# Altium PCB Tassel43_Without_RGB_Right.pcbdoc
Units mil, origin at the board's own origin, x right, y up, seen from the top; angles counter-clockwise.
Board outline 4200 x 3700 mil, 2 copper layers (Top Layer, Bottom Layer); 34 components, 30 nets, 83 pads, 20 vias.
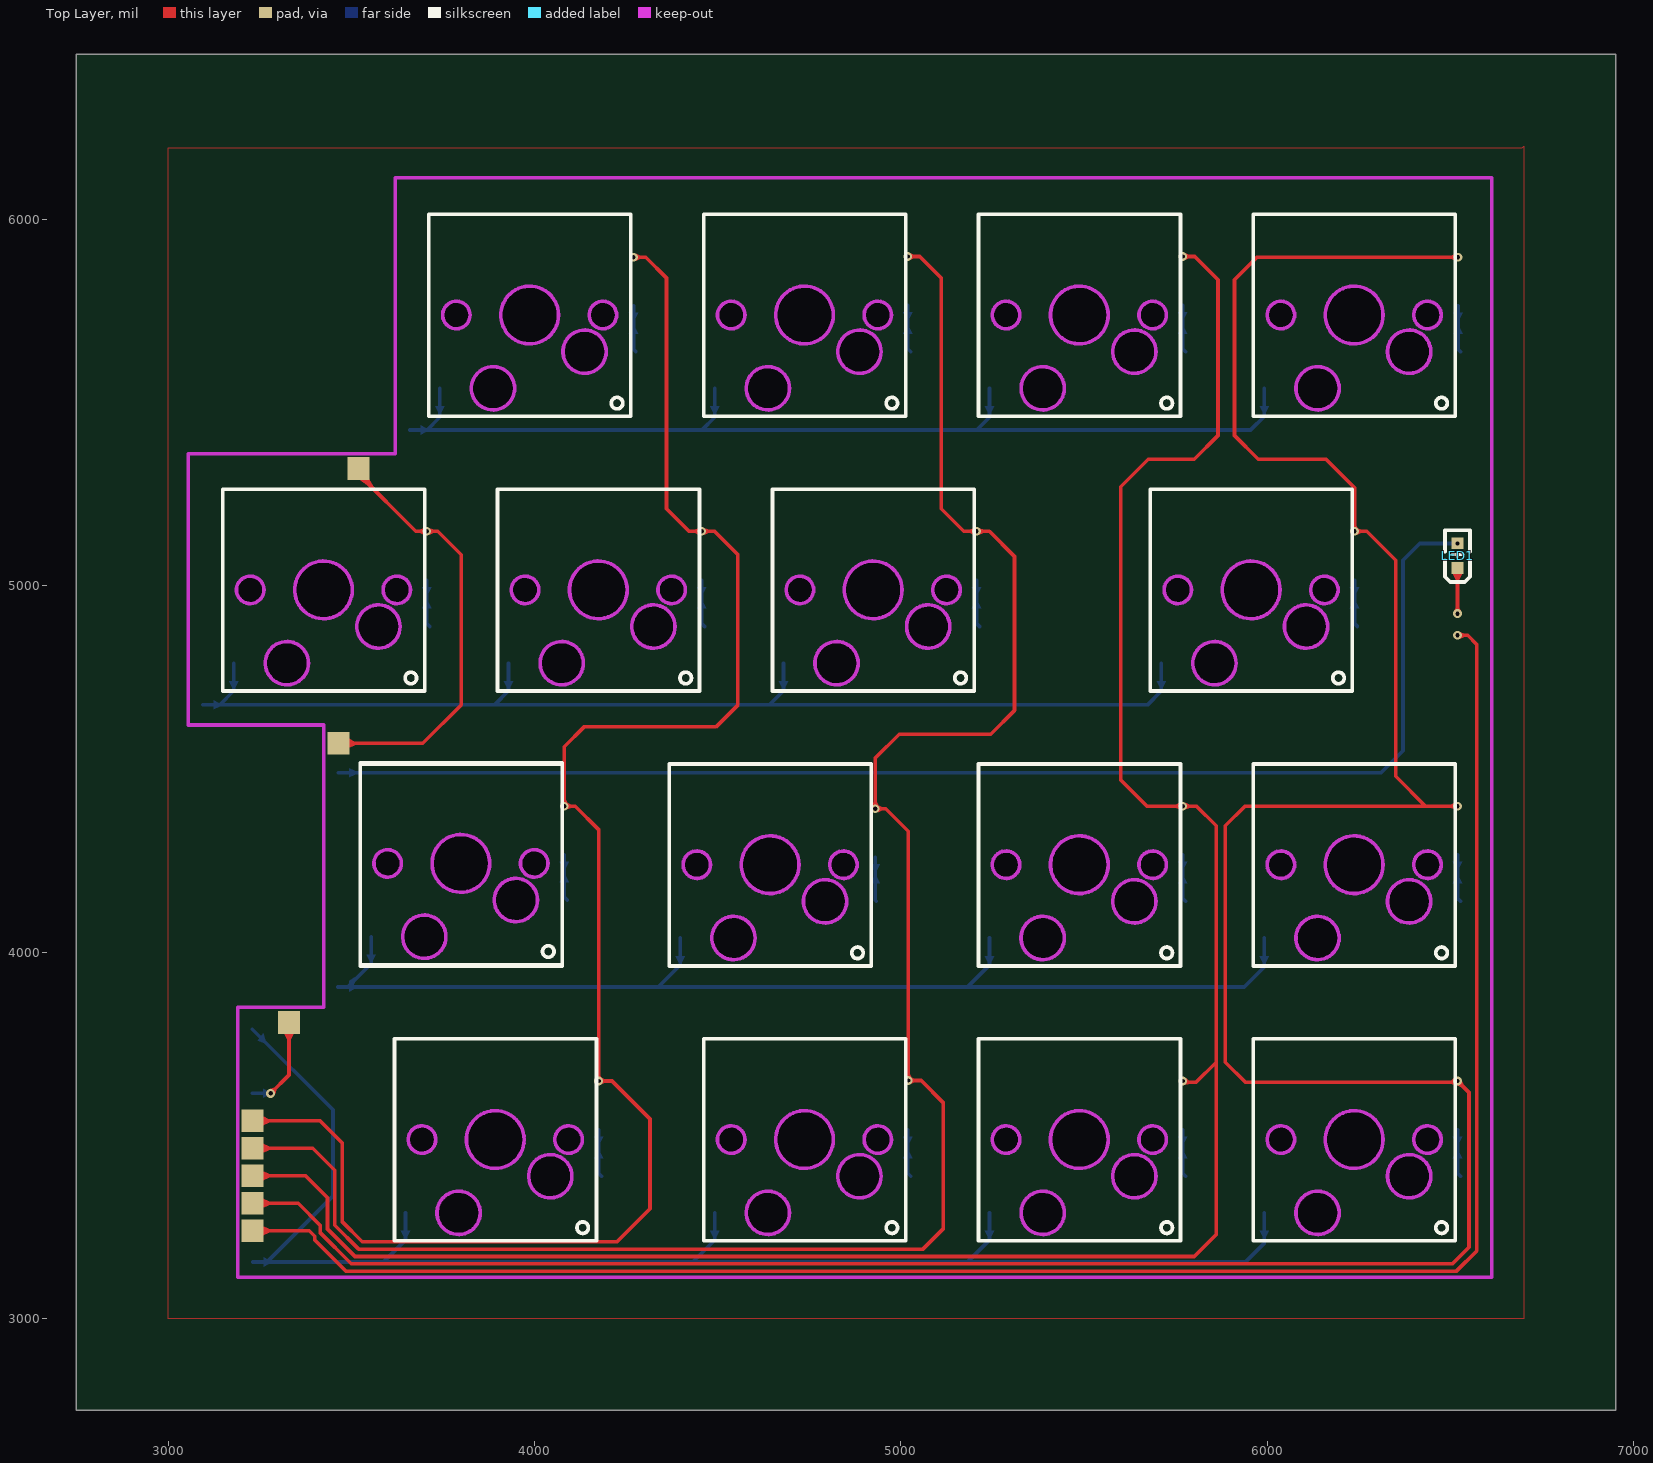
[diagram p0: Top Layer view]
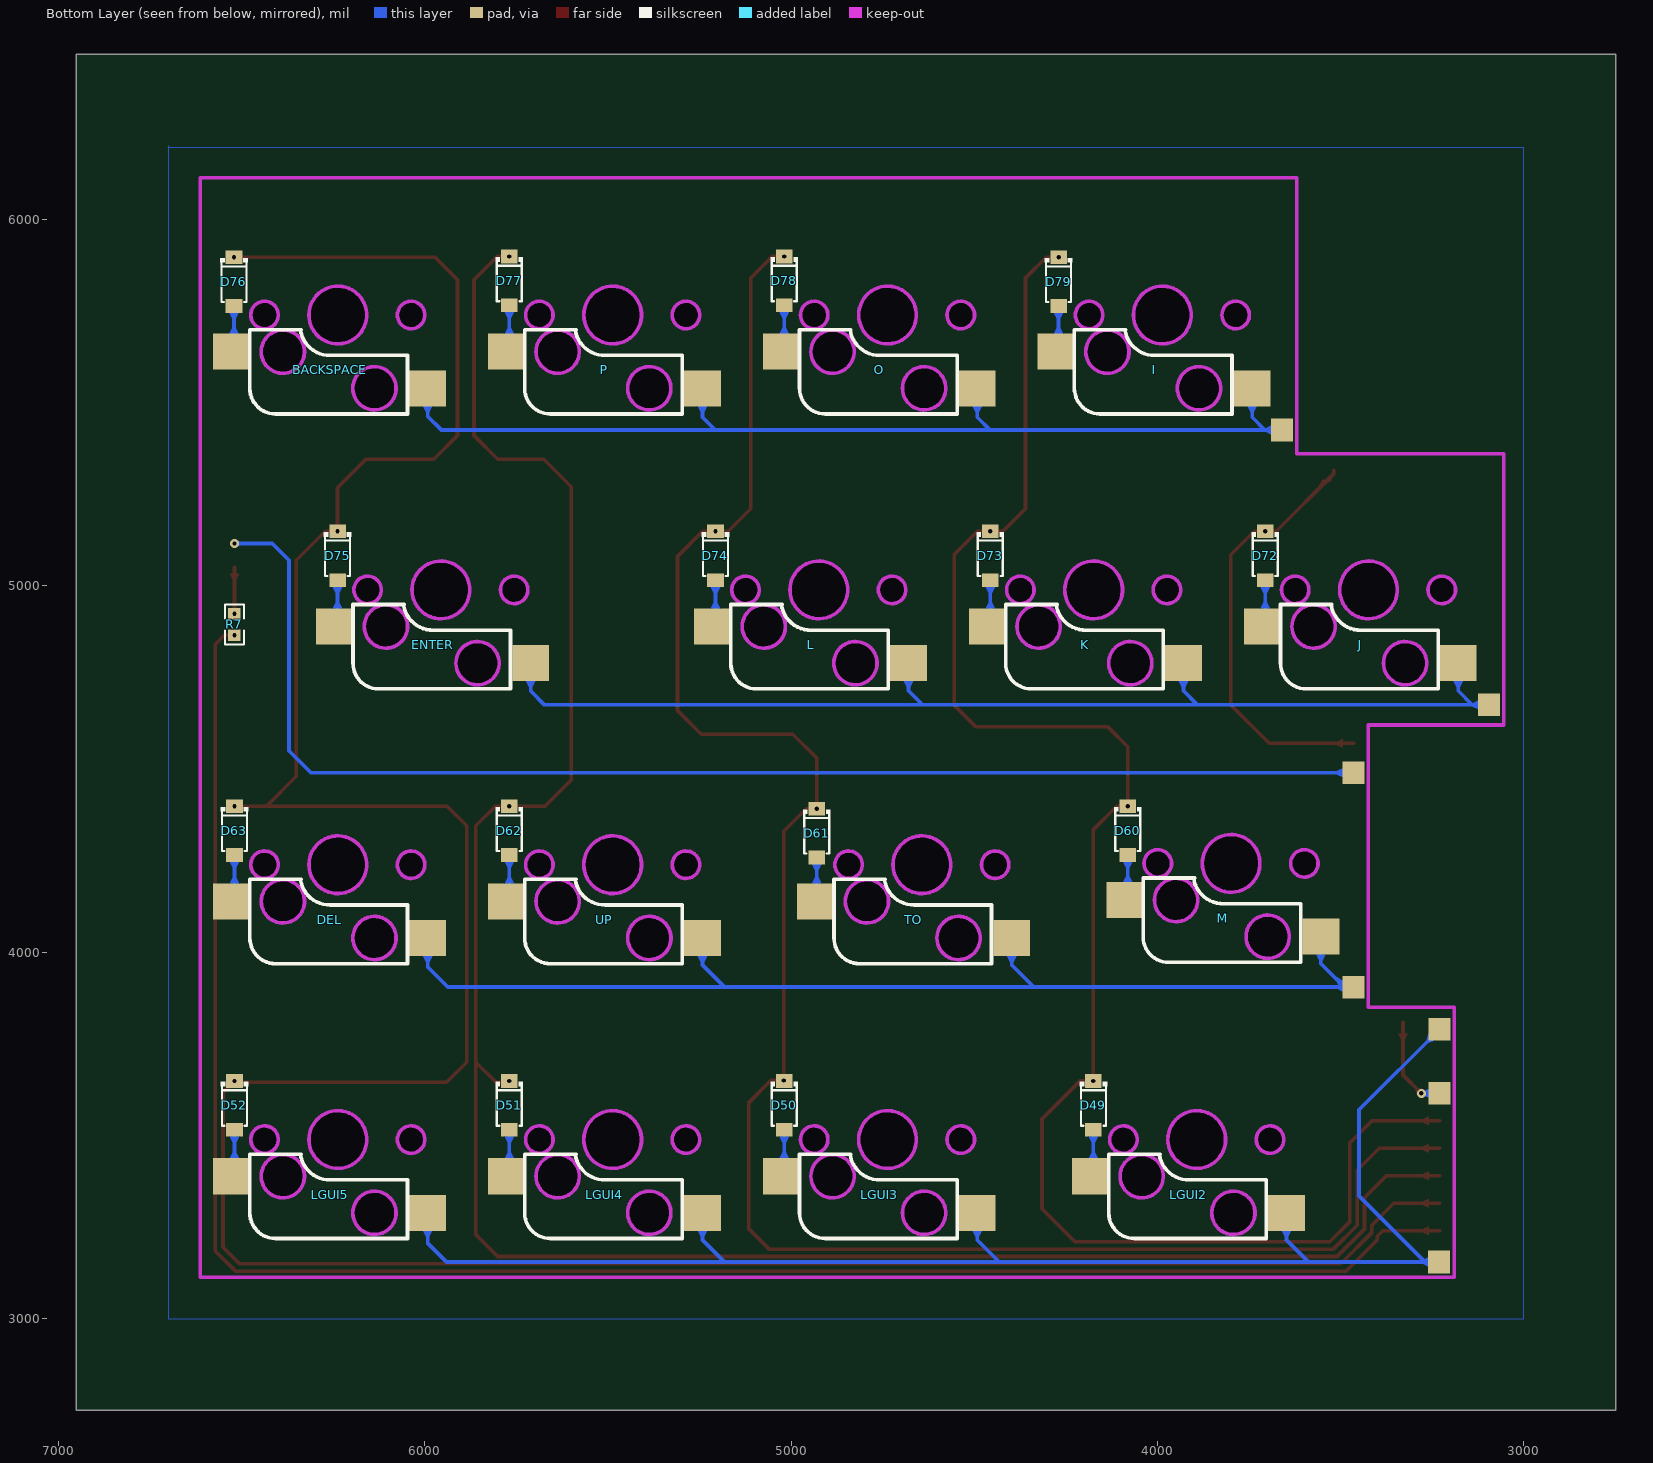
[diagram p1: Bottom Layer view, seen from below]

## Layer stack, top to bottom
Top Layer: signal copper (thickness not stored)
Dielectric: dielectric 12.6, FR-4, Dk 4.8
Bottom Layer: signal copper (thickness not stored)

## Board outline
6950,2750 2750,2750 2750,6450 6950,6450

## Components (designator, comment, footprint, x,y, rotation, side; value= is the part's Value field where it differs from the comment)
BACKSPACE "凯华热插拨" 凯华热插拨 6236.74,5738.89 r0 top
D49 "1N4148W" SOD-123_L2.8-W1.8-LS3.7-RD 4174.88,3582 r270 bottom
D50 "1N4148W" SOD-123_L2.8-W1.8-LS3.7-RD 5018.65,3582 r270 bottom
D51 "1N4148W" SOD-123_L2.8-W1.8-LS3.7-RD 5768.66,3582 r270 bottom
D52 "1N4148W" SOD-123_L2.8-W1.8-LS3.7-RD 6518.68,3582 r270 bottom
D60 "1N4148W" SOD-123_L2.8-W1.8-LS3.7-RD 4081.13,4332.01 r270 bottom
D61 "1N4148W" SOD-123_L2.8-W1.8-LS3.7-RD 4930,4325 r270 bottom
D62 "1N4148W" SOD-123_L2.8-W1.8-LS3.7-RD 5768.66,4332.01 r270 bottom
D63 "1N4148W" SOD-123_L2.8-W1.8-LS3.7-RD 6518.68,4332.01 r270 bottom
D72 "1N4148W" SOD-123_L2.8-W1.8-LS3.7-RD 3706.12,5082.03 r270 bottom
D73 "1N4148W" SOD-123_L2.8-W1.8-LS3.7-RD 4456.14,5082.03 r270 bottom
D74 "1N4148W" SOD-123_L2.8-W1.8-LS3.7-RD 5206.15,5082.03 r270 bottom
D75 "1N4148W" SOD-123_L2.8-W1.8-LS3.7-RD 6237.43,5082.03 r270 bottom
D76 "1N4148W" SOD-123_L2.8-W1.8-LS3.7-RD 6520,5830 r270 bottom
D77 "1N4148W" SOD-123_L2.8-W1.8-LS3.7-RD 5768.66,5832.05 r270 bottom
D78 "1N4148W" SOD-123_L2.8-W1.8-LS3.7-RD 5018.65,5832.05 r270 bottom
D79 "1N4148W" SOD-123_L2.8-W1.8-LS3.7-RD 4270,5830 r270 bottom
DEL "凯华热插拨" 凯华热插拨 6236.66,4238.89 r0 top
ENTER "凯华热插拨" 凯华热插拨 5955.45,4988.9 r0 top
I "凯华热插拨" 凯华热插拨 3986.74,5738.89 r0 top
J "凯华热插拨" 凯华热插拨 3424.24,4988.9 r0 top
K "凯华热插拨" 凯华热插拨 4174.24,4988.9 r0 top
L "凯华热插拨" 凯华热插拨 4924.25,4988.9 r0 top
LED1 "TJ-S1608SW6TGLC2R-A5" LED0603-R-RD_RED 6518.68,5082.03 r90 top
LGUI2 "凯华热插拨" 凯华热插拨 3892.98,3488.89 r0 top
LGUI3 "凯华热插拨" 凯华热插拨 4736.72,3488.89 r0 top
LGUI4 "凯华热插拨" 凯华热插拨 5486.72,3488.89 r0 top
LGUI5 "凯华热插拨" 凯华热插拨 6236.71,3488.89 r0 top
M "凯华热插拨" 凯华热插拨 3799.18,4242.51 r0 top
O "凯华热插拨" 凯华热插拨 4736.74,5738.89 r0 top
P "凯华热插拨" 凯华热插拨 5486.74,5738.89 r0 top
R7 "1kΩ" R0603 6518.68,4894.53 r90 bottom
TO "凯华热插拨" 凯华热插拨 4642.92,4238.89 r0 top
UP "凯华热插拨" 凯华热插拨 5486.66,4238.89 r0 top

## Footprints (in the part's own frame and the unit in brackets; to place one, negate y for a bottom-side part, rotate by r counter-clockwise, add the part's x,y. Pads: shape width x height; smd on the part's side, far side on the other; paste and mask are expansions set on the pad)
LED0603-R-RD_RED [mm]
  rect 0.8x0.8 smd: 1(0.851,0) 2(-0.851,0)
  silkscreen extent -1.82,-0.86 1.77,0.86
R0603 [mil]
  rect 31.75x34.02 smd: 1(-29.66,0) 2(29.65,0)
  silkscreen extent -55,-26 55,26
SOD-123_L2.8-W1.8-LS3.7-RD [mm]
  rect 0.95x1.15 smd: 1(-1.692,0) 2(1.692,0)
  silkscreen extent -1.63,-0.94 1.41,0.94
凯华热插拨 [mm]
  rect 2.55x2.5 smd far side: K1(-6.223,-5.08) K2(7.366,-2.54)
  Multi-Layer board cut-out: 2,0 1.729,0.996 0.997,1.724 0,1.99 -0.997,1.724 -1.729,0.996 -2,0 -2,0 -1.729,-0.996 -0.997,-1.724 0,-1.99 0.997,-1.724 1.729,-0.996 2,0
  Multi-Layer board cut-out: -1.04,-5.08 -1.189,-4.429 -1.605,-3.907 -2.206,-3.618 -2.874,-3.618 -3.475,-3.907 -3.892,-4.429 -4.04,-5.08 -4.04,-5.08 -3.839,-5.83 -3.29,-6.379 -2.54,-6.58 -1.79,-6.379 -1.241,-5.83 -1.04,-5.08
  Multi-Layer board cut-out: 5.31,-2.54 5.161,-1.889 4.745,-1.367 4.144,-1.078 3.476,-1.078 2.875,-1.367 2.458,-1.889 2.31,-2.54 2.31,-2.54 2.511,-3.29 3.06,-3.839 3.81,-4.04 4.56,-3.839 5.109,-3.29 5.31,-2.54
  Multi-Layer board cut-out: -4.127,0 -4.257,0.473 -4.606,0.819 -5.08,0.946 -5.554,0.819 -5.903,0.473 -6.032,0 -6.032,0 -5.903,-0.473 -5.554,-0.819 -5.08,-0.946 -4.606,-0.819 -4.257,-0.473 -4.127,0
  Multi-Layer board cut-out: 6.032,0 5.903,0.473 5.554,0.819 5.08,0.946 4.606,0.819 4.257,0.473 4.128,0 4.128,0 4.257,-0.473 4.606,-0.819 5.08,-0.946 5.554,-0.819 5.903,-0.473 6.033,0
  silkscreen extent -6.98,-7.01 7.01,6.98

## Free pads (board coordinates)
  rect 59.84x61.81 smd far side: 39(3230,3615) 51(3231.44,3155) 53(3230,3790) 57(3465,3905) 59(3465,4490) 63(3095,4675) 67(3660,5425)
  rect 59.84x61.81 smd: 40(3230,3540) 43(3230,3465) 45(3230,3390) 47(3230,3315) 49(3230,3240) 54(3330,3808.2) 61(3465,4570) 65(3520,5320)

## Via types
v1: diameter 24, hole 12, Top Layer to Bottom Layer, 20 vias

## Nets (pads, with @x,y where several pads share a name; then routed paths per layer and width w, separated by ;. In a path a pad name is that pad's centre, name@x,y a point inside that pad or via, vN(x,y) a via of type N, cw(c..) or ccw(c..) an arc to the next point about the centre after c; other vN are vias at no path point)
CAPLED: pad.49 R7.1 | length 5138.5
  Top Layer w10: pad.49 3385,3240 3400,3225 3400,3215 3485,3130 3495,3130 ; 3490,3130 6516.2,3130 6571.3,3185.1 6571.3,4840.1 6546.4,4865 v1(6518.68,4864.87)
CAPS1_4: D49.2 LGUI2.K2 | length 129.9
  Bottom Layer w10: D49.2 4174.9,3397 LGUI2.K2
COL7: D72.1 pad.39 pad.54 pad.61 pad.65 | length 1434.6
  Top Layer w10: v1(3280,3615) 3330,3665 pad.54 ; pad.61@3464.4,4570 3695,4570 3800,4675 3800,5085 3736.3,5148.7 v1(3706.12,5148.66) 3676.3,5148.7 3518.6,5306.4 pad.65@3518.6,5314.9
  Bottom Layer w10: pad.39 v1(3280,3615)
COL8: D49.1 D60.1 D73.1 D79.1 pad.40 | length 4703.3
  Top Layer w10: pad.40 3415,3540 3475,3480 3475,3265 3530,3210 4225,3210 4315,3300 4315,3545 4211.4,3648.6 v1(4174.88,3648.63) 4174.9,4335.1 4111.4,4398.6 v1(4081.13,4398.64) 4081.1,4561.1 4135,4615 4495,4615 4555,4675 4555,5085 4491.3,5148.7 v1(4456.14,5148.66) 4421.3,5148.7 4360,5210 4360,5840 4303.4,5896.6 v1(4270,5896.63)
COL9: D50.1 D61.1 D74.1 D78.1 pad.43 | length 5361.6
  Top Layer w10: pad.43 3395,3465 3455,3405 3455,3255 3520,3190 5060,3190 5115,3245 5115,3590 5055,3650 v1(5020,3650) 5020,4330 4958.37,4391.63 v1(4930,4391.63) ; v1(4930,4391.63) 4930,4530 4995,4595 5245,4595 5310,4660 5310,5080 5241.3,5148.7 v1(5206.15,5148.66) 5171.3,5148.7 5110,5210 5110,5840 5051.3,5898.7 v1@5018.7,5898.7
  other v1: 5018.65,5898.68
COL10: D51.1 D62.1 D77.1 pad.45 | length 6008.9
  Top Layer w10: pad.45 3375,3390 3435,3330 3435,3245 3510,3170 5800,3170 5860,3230 5860,3700 ; v1(5768.67,3648.63) 5772.3,3645 5805,3645 5860,3700 ; v1(5768.67,4398.64) 5806.36,4398.64 5860,4345 5860,3700 ; v1(5768.67,4398.64) 5671.4,4398.6 5600,4470 5600,5270 5675,5345 5800,5345 5865,5410 5865,5835 5801.3,5898.7 v1(5768.67,5898.68)
COL11: D52.1 D63.1 D75.1 D76.1 pad.47 | length 8260.2
  Top Layer w10: pad.47 3355,3315 3415,3255 3415,3235 3500,3150 6505,3150 6550,3195 6550,3617.3 v1(6518.68,3648.63) ; v1(6518.68,3648.63) 6515.05,3645 5940,3645 5885,3700 5885,4345 5938.6,4398.6 6431.4,4398.6 ; v1(6518.68,4398.64) 6431.4,4398.6 ; v1(6520,5896.63) 5971.6,5896.6 5910,5835 5910,5410 5975,5345 6160,5345 6237.4,5267.6 v1(6237.43,5148.66) 6271.3,5148.7 6350,5070 6350,4480 6431.4,4398.6
D76_2: BACKSPACE.K2 D76.2 | length 127.3
  Bottom Layer w10: D76.2 6520,5645.6 BACKSPACE.K2
D77_2: D77.2 P.K2 | length 129.8
  Bottom Layer w10: D77.2 5768.7,5647 P.K2
D78_2: D78.2 O.K2 | length 129.8
  Bottom Layer w10: D78.2 5018.7,5647 O.K2
D79_2: D79.2 I.K2 | length 127.3
  Bottom Layer w10: D79.2 4270,5645.6 I.K2
DEL1_4: D63.2 DEL.K2 | length 129.8
  Bottom Layer w10: D63.2 6518.7,4146.9 DEL.K2
DOWN1_4: D51.2 LGUI4.K2 | length 129.8
  Bottom Layer w10: D51.2 5768.7,3396.9 LGUI4.K2
ENTER1_4: D75.2 ENTER.K2 | length 129.9
  Bottom Layer w10: D75.2 6237.4,4896.9 ENTER.K2
GND: 
J2_4: D72.2 J.K2 | length 129.9
  Bottom Layer w10: D72.2 3706.1,4897 J.K2
K1_4: D73.2 K.K2 | length 129.9
  Bottom Layer w10: D73.2 4456.1,4897 K.K2
L1_4: D74.2 L.K2 | length 129.9
  Bottom Layer w10: D74.2 5206.2,4897 L.K2
LEFT1_4: D50.2 LGUI3.K2 | length 129.8
  Bottom Layer w10: D50.2 5018.7,3397 LGUI3.K2
M1_4: D60.2 M.K2 | length 126.3
  Bottom Layer w10: D60.2 4081.1,4150.6 M.K2
R7_2: LED1.2 R7.2 | length 125.8
  Top Layer w10: v1(6518.68,4924.18) LED1.2@6518.7,5050
RIGHT1_4: D52.2 LGUI5.K2 | length 129.8
  Bottom Layer w10: D52.2 6518.7,3396.9 LGUI5.K2
ROW0: BACKSPACE.K1 I.K1 O.K1 P.K1 pad.67 | length 2807.6
  Bottom Layer w10: pad.67@3660.3,5425.3 5953.9,5425 5991.7,5462.7 BACKSPACE.K1 ; 3707.1,5425.1 3741.7,5459.7 I.K1 ; 4457.1,5425.1 4491.7,5459.7 O.K1 ; 5207.1,5425.1 5241.7,5459.7 P.K1
ROW1: ENTER.K1 J.K1 K.K1 L.K1 pad.63 | length 3097.3
  Bottom Layer w10: pad.63@3094.4,4675 5672.7,4675 5710.5,4712.7 ENTER.K1 ; 3140.9,4675 3179.2,4713.3 J.K1 ; 3890.9,4675 3929.2,4713.3 K.K1 ; 4640.9,4675 4679.3,4713.3 L.K1
ROW2: DEL.K1 M.K1 pad.57 TO.K1 UP.K1 | length 3106.2
  Bottom Layer w10: pad.57@3463.1,3905 5936.4,3905 5991.4,3960 DEL.K1 ; pad.57@3494.1,3908.6 3554.1,3968.6 M.K1@3554.1,4042.5 ; 4337.9,3905 4397.9,3965 TO.K1 ; 5181.6,3905 5241.6,3965 UP.K1@5241.6,4038.9
ROW3: LGUI2.K1 LGUI3.K1 LGUI4.K1 LGUI5.K1 pad.51 pad.53 | length 4140.9
  Bottom Layer w10: pad.53 3450,3570 3450,3335 3270,3155 ; pad.51 5940,3155 5991.7,3206.7 LGUI5.K1 ; 3587.9,3155 3647.9,3215 LGUI2.K1@3647.9,3288.9 ; 4431.7,3155 4491.7,3215 LGUI3.K1 ; 5181.7,3155 5241.7,3215 LGUI4.K1
TO1_4: D61.2 TO.K2 | length 120.7
  Bottom Layer w10: D61.2 4930,4141.8 TO.K2
UP1_4: D62.2 UP.K2 | length 129.8
  Bottom Layer w10: D62.2 5768.7,4146.9 UP.K2
VCC: LED1.1 pad.59 | length 3617.2
  Bottom Layer w10: pad.59@3465.2,4490 6310,4490 6370,4550 6370,5070 6415.5,5115.5 v1(6518.7,5115.5)
"": 

## Polygon pours and split planes (outlines as drawn)
GND on Bottom Layer (hatched 45Degree grid 30 track 10, pour order 6): 3000,6195 6695,6195 6700,6200 6700,3000 3000,3000
GND on Top Layer (hatched 45Degree grid 30 track 10, pour order 2): 3000,6195 6695,6195 6700,6200 6700,3000 3000,3000

## Keep-outs
Board Outline Layer:
  lines w10 net COL7: 3190,3115 3190,3850 3425,3850 3425,4620 3055,4620 3055,5360 3620,5360 3620,6110 ; 3191,3113.3 6612.3,3113.3 6612.3,6113.3 3620.1,6113.3
Multi-Layer:
  circle w10: c3986.74,5738.89 r78.74
  circle w10: c3886.74,5538.89 r59.05
  circle w10: c4136.74,5638.89 r59.05
  circle w10: c3786.74,5738.89 r37.5
  circle w10: c4186.74,5738.89 r37.5
  circle w10: c4736.74,5738.89 r78.74
  circle w10: c4636.74,5538.89 r59.05
  circle w10: c4886.74,5638.89 r59.05
  circle w10: c4536.74,5738.89 r37.5
  circle w10: c4936.74,5738.89 r37.5
  circle w10: c5486.74,5738.89 r78.74
  circle w10: c5386.74,5538.89 r59.05
  circle w10: c5636.74,5638.89 r59.05
  circle w10: c5286.74,5738.89 r37.5
  circle w10: c5686.74,5738.89 r37.5
  circle w10: c6236.74,5738.89 r78.74
  circle w10: c6136.74,5538.89 r59.05
  circle w10: c6386.74,5638.89 r59.05
  circle w10: c6036.74,5738.89 r37.5
  circle w10: c6436.74,5738.89 r37.5
  circle w10: c3424.24,4988.9 r78.74
  circle w10: c3324.24,4788.9 r59.05
  circle w10: c3574.24,4888.9 r59.05
  circle w10: c3224.24,4988.9 r37.5
  circle w10: c3624.24,4988.9 r37.5
  circle w10: c4174.24,4988.9 r78.74
  circle w10: c4074.24,4788.9 r59.05
  circle w10: c4324.24,4888.9 r59.05
  circle w10: c3974.24,4988.9 r37.5
  circle w10: c4374.24,4988.9 r37.5
  circle w10: c4924.25,4988.9 r78.74
  circle w10: c4824.25,4788.9 r59.05
  circle w10: c5074.25,4888.9 r59.05
  circle w10: c4724.25,4988.9 r37.5
  circle w10: c5124.25,4988.9 r37.5
  circle w10: c5955.45,4988.9 r78.74
  circle w10: c5855.45,4788.9 r59.05
  circle w10: c6105.45,4888.9 r59.05
  circle w10: c5755.45,4988.9 r37.5
  circle w10: c6155.45,4988.9 r37.5
  circle w10: c3799.18,4242.51 r78.74
  circle w10: c3699.18,4042.51 r59.05
  circle w10: c3949.18,4142.51 r59.05
  circle w10: c3599.18,4242.51 r37.5
  circle w10: c3999.18,4242.51 r37.5
  circle w10: c4642.92,4238.89 r78.74
  circle w10: c4542.92,4038.89 r59.05
  circle w10: c4792.92,4138.89 r59.05
  circle w10: c4442.92,4238.89 r37.5
  circle w10: c4842.92,4238.89 r37.5
  circle w10: c5486.66,4238.89 r78.74
  circle w10: c5386.66,4038.89 r59.05
  circle w10: c5636.66,4138.89 r59.05
  circle w10: c5286.66,4238.89 r37.5
  circle w10: c5686.66,4238.89 r37.5
  circle w10: c6236.66,4238.89 r78.74
  circle w10: c6136.66,4038.89 r59.05
  circle w10: c6386.66,4138.89 r59.05
  circle w10: c6036.66,4238.89 r37.5
  circle w10: c6436.66,4238.89 r37.5
  circle w10: c3892.98,3488.89 r78.74
  circle w10: c3792.98,3288.89 r59.05
  circle w10: c4042.98,3388.89 r59.05
  circle w10: c3692.98,3488.89 r37.5
  circle w10: c4092.98,3488.89 r37.5
  circle w10: c4736.72,3488.89 r78.74
  circle w10: c4636.72,3288.89 r59.05
  circle w10: c4886.72,3388.89 r59.05
  circle w10: c4536.72,3488.89 r37.5
  circle w10: c4936.72,3488.89 r37.5
  circle w10: c5486.72,3488.89 r78.74
  circle w10: c5386.72,3288.89 r59.05
  circle w10: c5636.72,3388.89 r59.05
  circle w10: c5286.72,3488.89 r37.5
  circle w10: c5686.72,3488.89 r37.5
  circle w10: c6236.71,3488.89 r78.74
  circle w10: c6136.71,3288.89 r59.05
  circle w10: c6386.71,3388.89 r59.05
  circle w10: c6036.71,3488.89 r37.5
  circle w10: c6436.71,3488.89 r37.5

## Other copper
Top Layer:
  region net COL7: 3548.4,5289.09 3523.4,5289.09 3543.83,5274.09 3557.97,5274.09
  region net COL7: 3494.92,4582.5 3494.92,4557.5 3509.92,4565 3509.92,4575
  region net COL7: 3342.5,3777.29 3317.5,3777.29 3325,3762.29 3335,3762.29
  region net CAPLED: 3259.92,3252.5 3259.92,3227.5 3274.92,3235 3274.92,3245
  region net COL11: 3259.92,3327.5 3259.92,3302.5 3274.92,3310 3274.92,3320
  region net COL10: 3259.92,3402.5 3259.92,3377.5 3274.92,3385 3274.92,3395
  region net COL9: 3259.92,3477.5 3259.92,3452.5 3274.92,3460 3274.92,3470
  region net COL8: 3259.92,3552.5 3259.92,3527.5 3274.92,3535 3274.92,3545
  region net R7_2: 6531.18,5032.78 6506.18,5032.78 6513.68,5017.78 6523.68,5017.78
  region net COL7: 3291.98,3614.25 3279.25,3626.98 3288.02,3630.09 3295.09,3623.02
  region net CAPLED: 6526.67,4855.91 6526.57,4873.91 6534.99,4869.96 6535.05,4859.96
  region net COL10: 5776.62,5889.69 5776.6,5907.69 5785,5903.7 5785.02,5893.7
  region net COL11: 6512.08,5887.62 6512.05,5905.62 6503.65,5901.6 6503.67,5891.6
  region net COL11: 6245.39,5139.68 6245.35,5157.68 6253.76,5153.7 6253.78,5143.7
  region net COL11: 6246.42,5156.61 6228.42,5156.58 6232.4,5164.99 6242.4,5165.01
  region net COL10: 5760.76,4389.62 5760.71,4407.62 5752.32,4403.6 5752.35,4393.6
  region net COL10: 5776.61,4389.64 5776.61,4407.64 5785.01,4403.64 5785.01,4393.64
  region net COL11: 6510.77,4389.62 6510.72,4407.62 6502.33,4403.6 6502.36,4393.6
  region net COL11: 6512.94,3638.09 6508.94,3655.64 6501.61,3650 6503.89,3640
  region net COL11: 6530.66,3649.38 6517.92,3636.65 6526.69,3633.54 6533.77,3640.61
  region net COL10: 5778.41,3655.64 5774.41,3638.09 5783.46,3640 5785.74,3650
  region net COL9: 5026.6,5889.69 5026.58,5907.69 5034.98,5903.7 5035,5893.7
  region net COL9: 5214.11,5139.68 5214.07,5157.68 5222.48,5153.7 5222.5,5143.7
  region net COL9: 5198.24,5157.68 5198.19,5139.68 5189.8,5143.7 5189.83,5153.7
  region net COL9: 4937.94,4382.63 4937.94,4400.63 4946.34,4396.63 4946.34,4386.63
  region net COL9: 4921,4399.57 4939,4399.57 4935,4407.97 4925,4407.97
  region net COL9: 5011,3657.94 5029,3657.94 5025,3666.34 5015,3666.34
  region net COL9: 5027.94,3641 5027.94,3659 5036.34,3655 5036.34,3645
  region net COL8: 4277.95,5905.62 4277.92,5887.62 4286.33,5891.6 4286.35,5901.6
  region net COL8: 4464.1,5139.68 4464.05,5157.68 4472.46,5153.7 4472.49,5143.7
  region net COL8: 4448.22,5157.68 4448.18,5139.68 4439.79,5143.7 4439.81,5153.7
  region net COL8: 4183.89,3656.55 4165.89,3656.58 4169.9,3664.98 4179.9,3664.96
  region net COL8: 4182.83,3657.62 4182.8,3639.62 4191.21,3643.6 4191.22,3653.6
  region net COL8: 4089.09,4407.62 4089.04,4389.62 4097.45,4393.6 4097.48,4403.6
  region net COL8: 4090.11,4406.59 4072.11,4406.56 4076.1,4414.97 4086.1,4414.99
  region net COL7: 3698.2,5157.68 3698.16,5139.68 3689.77,5143.7 3689.79,5153.7
  region net COL7: 3714.08,5139.68 3714.03,5157.68 3722.44,5153.7 3722.47,5143.7
  region net R7_2: 6509.68,4932.12 6527.68,4932.12 6523.68,4940.52 6513.68,4940.52
Bottom Layer:
  region net RIGHT1_4: 6506.18,3438.09 6531.18,3438.09 6523.68,3453.09 6513.68,3453.09
  region net ROW3: 6004.21,3239.69 5979.21,3239.69 5986.71,3224.69 5996.71,3224.69
  region net DOWN1_4: 5756.17,3438.09 5781.17,3438.09 5773.67,3453.09 5763.67,3453.09
  region net ROW3: 5254.18,3239.69 5229.18,3239.69 5236.68,3224.69 5246.68,3224.69
  region net LEFT1_4: 5006.15,3438.09 5031.15,3438.09 5023.65,3453.09 5013.65,3453.09
  region net ROW3: 4504.18,3239.69 4479.18,3239.69 4486.68,3224.69 4496.68,3224.69
  region net CAPS1_4: 4162.38,3438.09 4187.38,3438.09 4179.88,3453.09 4169.88,3453.09
  region net ROW3: 3660.44,3239.69 3635.44,3239.69 3642.94,3224.69 3652.94,3224.69
  region net DEL1_4: 6506.18,4188.09 6531.18,4188.09 6523.68,4203.09 6513.68,4203.09
  region net ROW2: 6004.01,3989.69 5979.01,3989.69 5986.46,3974.69 5996.46,3974.69
  region net UP1_4: 5756.17,4188.09 5781.17,4188.09 5773.67,4203.09 5763.67,4203.09
  region net ROW2: 5254.13,3989.69 5229.13,3989.69 5236.63,3974.69 5246.63,3974.69
  region net TO1_4: 4917.5,4188.09 4942.5,4188.09 4935,4203.09 4925,4203.09
  region net ROW2: 4410.39,3989.69 4385.39,3989.69 4392.89,3974.69 4402.89,3974.69
  region net M1_4: 4068.63,4191.7 4093.63,4191.7 4086.13,4206.7 4076.13,4206.7
  region net ROW2: 3566.65,3993.31 3541.65,3993.31 3549.15,3978.31 3559.15,3978.31
  region net ENTER1_4: 6224.93,4938.1 6249.93,4938.1 6242.43,4953.1 6232.43,4953.1
  region net ROW1: 5723,4739.69 5698,4739.69 5705.5,4724.69 5715.5,4724.69
  region net L1_4: 5193.65,4938.1 5218.65,4938.1 5211.15,4953.1 5201.15,4953.1
  region net ROW1: 4691.75,4739.69 4666.75,4739.69 4674.25,4724.69 4684.25,4724.69
  region net K1_4: 4443.64,4938.1 4468.64,4938.1 4461.14,4953.1 4451.14,4953.1
  region net ROW1: 3941.74,4739.69 3916.74,4739.69 3924.24,4724.69 3934.24,4724.69
  region net J2_4: 3693.62,4938.1 3718.62,4938.1 3711.12,4953.1 3701.12,4953.1
  region net ROW1: 3191.74,4739.69 3166.74,4739.69 3174.24,4724.69 3184.24,4724.69
  region net D76_2: 6507.5,5688.09 6532.5,5688.09 6525,5703.09 6515,5703.09
  region net ROW0: 6004.24,5489.69 5979.24,5489.69 5986.74,5474.69 5996.74,5474.69
  region net D77_2: 5756.17,5688.09 5781.17,5688.09 5773.67,5703.09 5763.67,5703.09
  region net ROW0: 5254.24,5489.69 5229.24,5489.69 5236.74,5474.69 5246.74,5474.69
  region net D78_2: 5006.15,5688.09 5031.15,5688.09 5023.65,5703.09 5013.65,5703.09
  region net ROW0: 4504.24,5489.69 4479.24,5489.69 4486.74,5474.69 4496.74,5474.69
  region net D79_2: 4257.5,5688.09 4282.5,5688.09 4275,5703.09 4265,5703.09
  region net ROW0: 3754.24,5489.69 3729.24,5489.69 3736.74,5474.69 3746.74,5474.69
  region net ROW0: 3689.92,5437.8 3689.92,5412.8 3704.92,5420.3 3704.92,5430.3
  region net ROW1: 3124.92,4687.5 3124.92,4662.5 3139.92,4670 3139.92,4680
  region net VCC: 3494.92,4502.5 3494.92,4477.5 3509.92,4485 3509.92,4495
  region net ROW2: 3494.92,3917.5 3494.92,3892.5 3509.92,3900 3509.92,3910
  region net ROW2: 3494.92,3921.89 3494.92,3896.89 3509.92,3917.32 3509.92,3931.46
  region net ROW3: 3259.92,3779.04 3244.85,3759.09 3259.43,3753.5 3265.51,3761.56
  region net ROW3: 3261.36,3167.5 3261.36,3142.5 3276.36,3150 3276.36,3160
  region net COL7: 3259.92,3627.5 3259.92,3602.5 3274.92,3610 3274.92,3620
  region net CAPS1_4: 4162.38,3496.67 4187.38,3496.67 4179.88,3481.67 4169.88,3481.67
  region net LEFT1_4: 5006.15,3496.67 5031.15,3496.67 5023.65,3481.67 5013.65,3481.67
  region net DOWN1_4: 5756.17,3496.67 5781.17,3496.67 5773.67,3481.67 5763.67,3481.67
  region net RIGHT1_4: 6506.18,3496.67 6531.18,3496.67 6523.68,3481.67 6513.68,3481.67
  region net M1_4: 4068.63,4246.68 4093.63,4246.68 4086.13,4231.68 4076.13,4231.68
  region net TO1_4: 4917.5,4239.67 4942.5,4239.67 4935,4224.67 4925,4224.67
  region net UP1_4: 5756.17,4246.68 5781.17,4246.68 5773.67,4231.68 5763.67,4231.68
  region net DEL1_4: 6506.18,4246.68 6531.18,4246.68 6523.68,4231.68 6513.68,4231.68
  region net J2_4: 3693.62,4996.7 3718.62,4996.7 3711.12,4981.7 3701.12,4981.7
  region net K1_4: 4443.64,4996.7 4468.64,4996.7 4461.14,4981.7 4451.14,4981.7
  region net L1_4: 5193.65,4996.7 5218.65,4996.7 5211.15,4981.7 5201.15,4981.7
  region net ENTER1_4: 6224.93,4996.7 6249.93,4996.7 6242.43,4981.7 6232.43,4981.7
  region net D76_2: 6507.5,5744.67 6532.5,5744.67 6525,5729.67 6515,5729.67
  region net D77_2: 5756.17,5746.71 5781.17,5746.71 5773.67,5731.71 5763.67,5731.71
  region net D78_2: 5006.15,5746.71 5031.15,5746.71 5023.65,5731.71 5013.65,5731.71
  region net D79_2: 4257.5,5744.67 4282.5,5744.67 4275,5729.67 4265,5729.67
  region net VCC: 6510.76,5106.5 6510.76,5124.5 6502.36,5120.5 6502.36,5110.5
  region net COL7: 3272.06,3606 3272.06,3624 3263.66,3620 3263.66,3610

## Silkscreen, mask and mechanical layers (free items; w line width, h text height)
Top Silkscreen Layer:
  lines w10 net "": 3700.41,4712.73 3700.41,5263.88 ; 3700.41,4712.73 3149.22,4712.73 3149.22,5263.88 3700.41,5263.88 ; 3700.42,4712.73 3700.42,5263.88 ; 3700.42,4712.73 3149.24,4712.73 3149.24,5263.88 3700.42,5263.88 ; 4450.4,4712.73 4450.4,5263.88 ; 4450.4,4712.73 3899.22,4712.73 3899.22,5263.88 4450.4,5263.88 ; 4450.41,4712.73 4450.41,5263.88 ; 4450.41,4712.73 3899.24,4712.73 3899.24,5263.88 4450.41,5263.88 ; 5200.4,4712.73 5200.4,5263.88 ; 5200.4,4712.73 4649.22,4712.73 4649.22,5263.88 5200.4,5263.88 ; 5200.41,4712.73 5200.41,5263.88 ; 5200.41,4712.73 4649.24,4712.73 4649.24,5263.88 5200.41,5263.88 ; 3524.22,3962.72 4075.4,3962.72 4075.4,4513.88 3524.22,4513.88 3524.22,3962.72 ; 3617.93,3212.72 4169.14,3212.72 4169.14,3763.88 3617.93,3763.88 3617.93,3212.72 ; 3711.74,5462.73 4262.88,5462.73 4262.88,6013.88 3711.74,6013.88 3711.74,5462.73 ; 4367.92,3962.72 4919.14,3962.72 4919.14,4513.88 4367.92,4513.88 4367.92,3962.72 ; 4461.74,3212.72 5012.88,3212.72 5012.88,3763.88 4461.74,3763.88 4461.74,3212.72 ; 4461.74,5462.73 5012.88,5462.73 5012.88,6013.88 4461.74,6013.88 4461.74,5462.73 ; 5211.66,3962.72 5762.88,3962.72 5762.88,4513.88 5211.66,4513.88 5211.66,3962.72 ; 5211.74,3212.72 5762.88,3212.72 5762.88,3763.88 5211.74,3763.88 5211.74,3212.72 ; 5211.74,5462.73 5762.88,5462.73 5762.88,6013.88 5211.74,6013.88 5211.74,5462.73 ; 5680.48,4712.73 6231.62,4712.73 6231.62,5263.88 5680.48,5263.88 5680.48,4712.73 ; 5961.74,3212.72 6512.88,3212.72 6512.88,3763.88 5961.74,3763.88 5961.74,3212.72 ; 5961.74,3962.72 6512.88,3962.72 6512.88,4513.88 5961.74,4513.88 5961.74,3962.72 ; 5961.74,5462.73 6512.88,5462.73 6512.88,6013.88 5961.74,6013.88 5961.74,5462.73